# Altium PCB PCB_4k7_G_V3.02_2022-01-05.pcbdoc
Units mil, origin at the board's own origin, x right, y up, seen from the top; angles counter-clockwise.
Board outline 2390.5 x 3974 mil, 2 copper layers (Top Layer, Bottom Layer); 29 components, 29 nets, 109 pads, 3 vias.
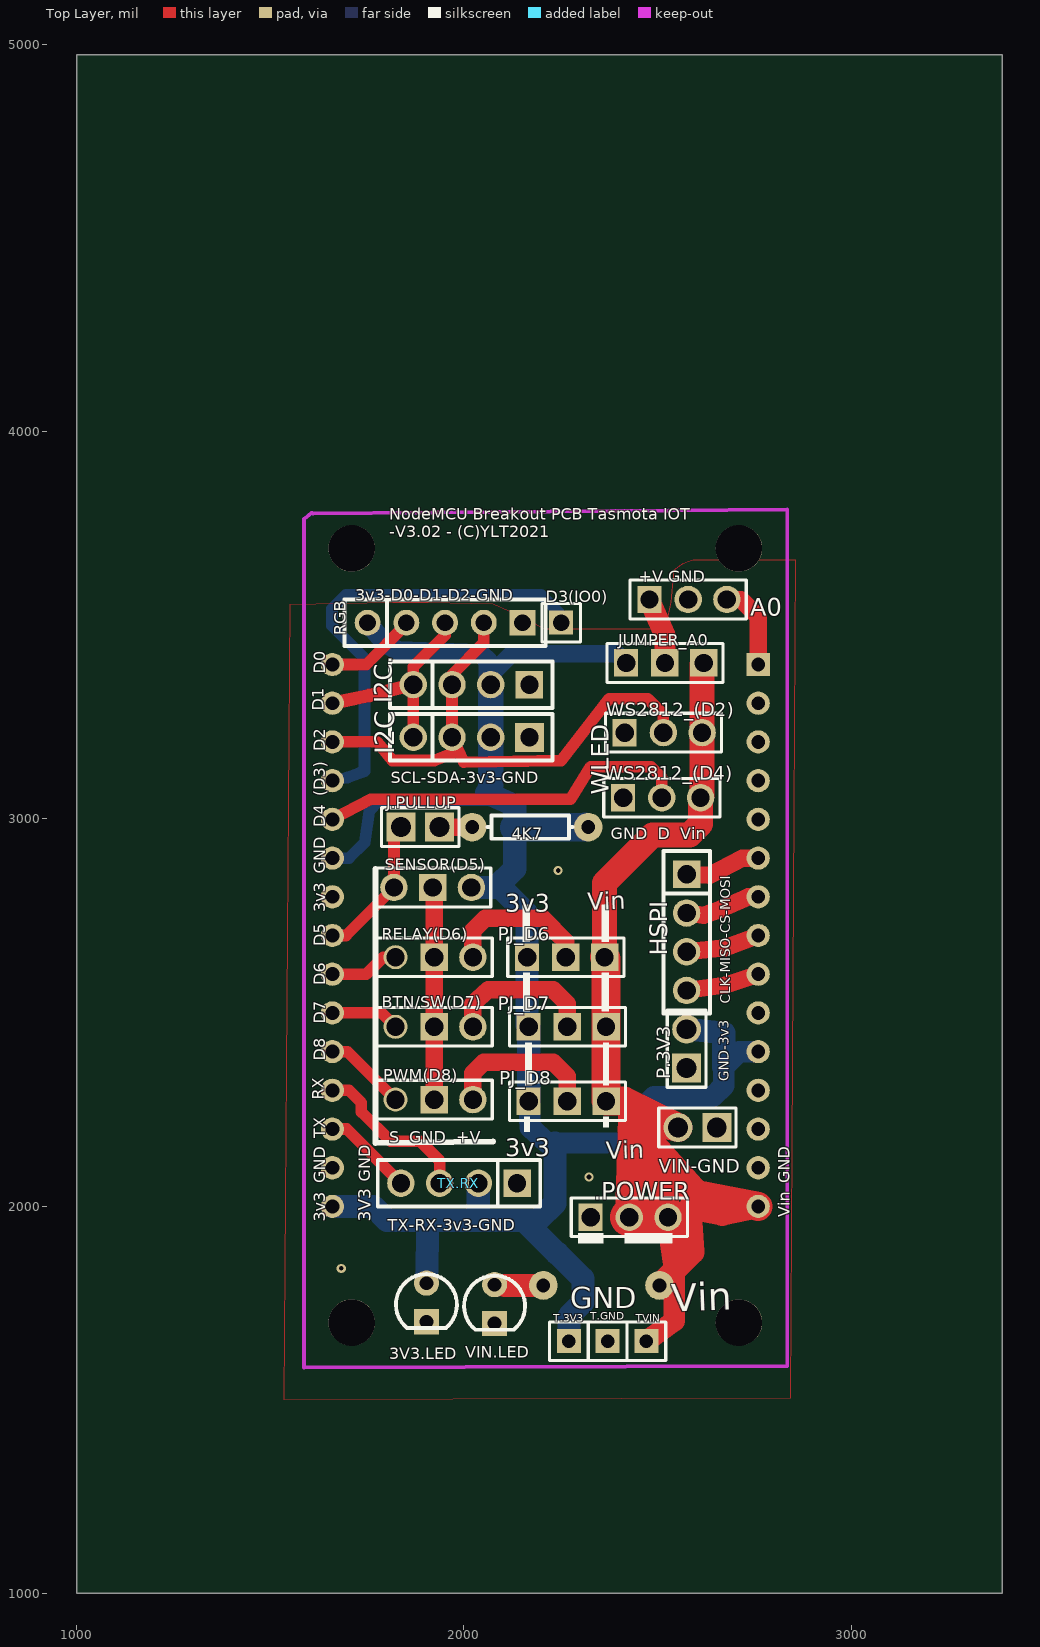
[diagram p0: Top Layer view]
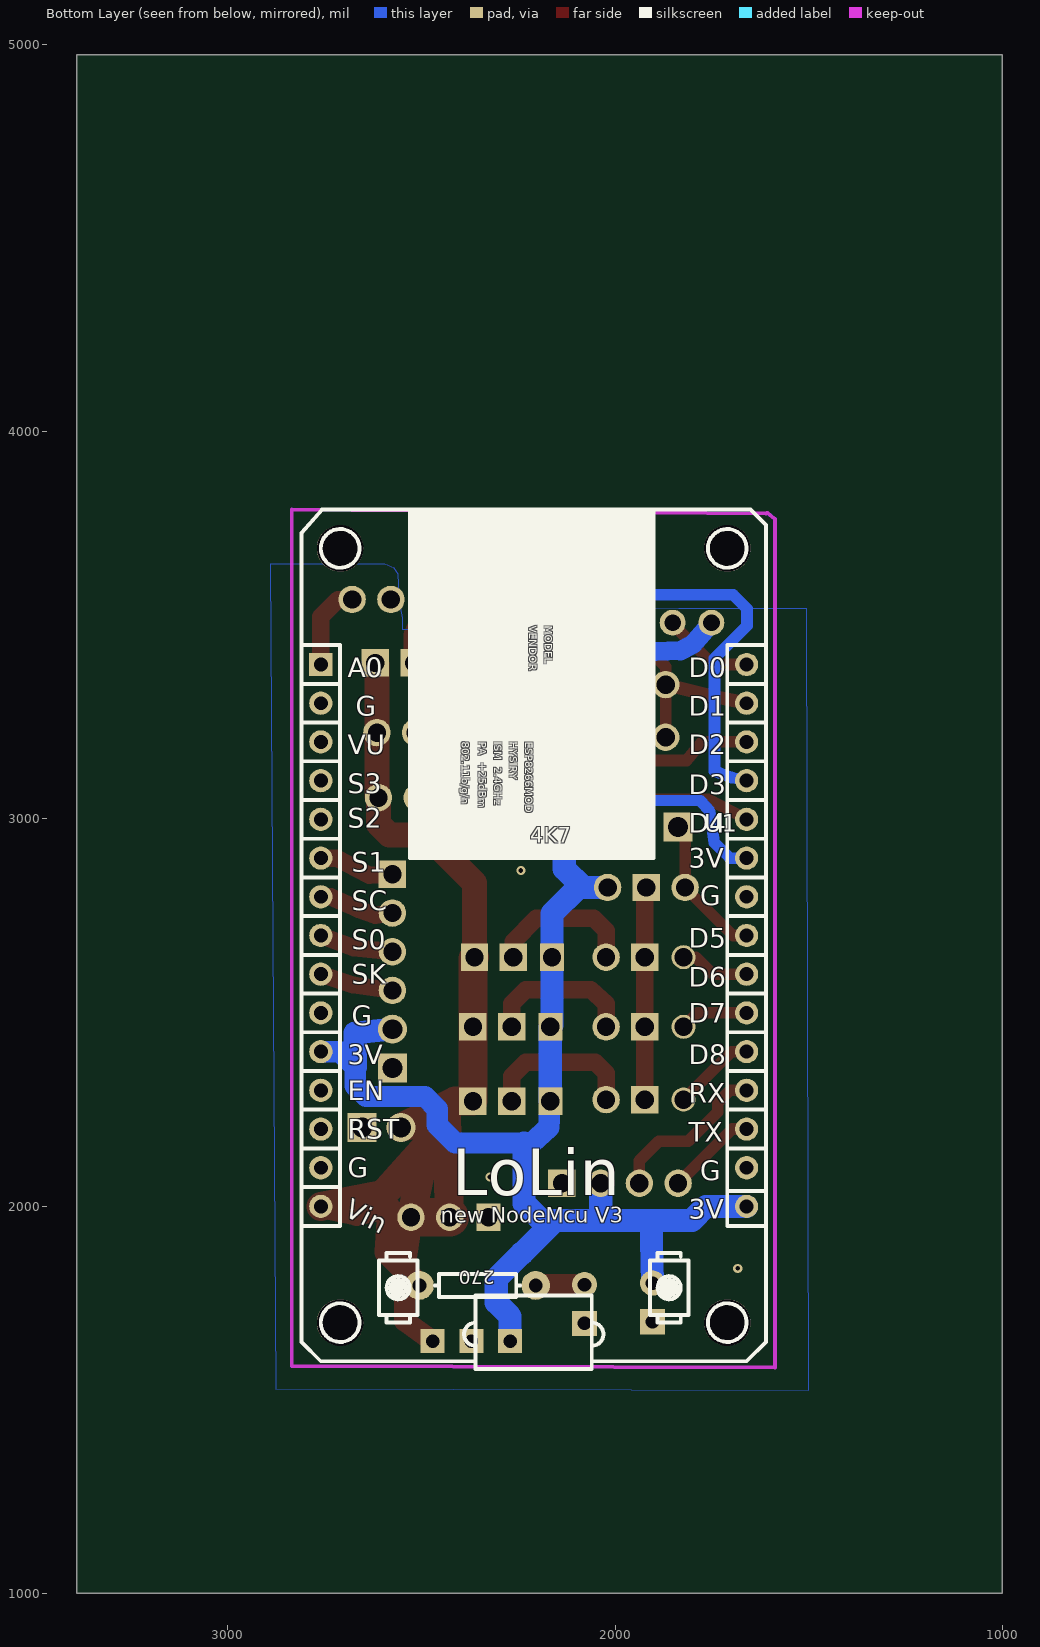
[diagram p1: Bottom Layer view, seen from below]

## Layer stack, top to bottom
Top Layer: signal copper (thickness not stored)
Dielectric: dielectric 12.6, FR-4, Dk 4.8
Bottom Layer: signal copper (thickness not stored)

## Board outline
3390.5,1000 1000,1000 1000,4974 3390.5,4974

## Components (designator, comment, footprint, x,y, rotation, side; value= is the part's Value field where it differs from the comment)
3V3.LED "LED-TH-3mm_G" LED-TH_BD3.0_GREEN 1903.25,1751 r0 top
4K7 "4k7" AXIAL-0.3#1 2171.25,2979 r180 top
270 "4k7" AXIAL-0.3#2 2355.25,1795 r180 bottom
.POWER "Header-Male-2.54_1x3" HDR-TH_3P-P2.54-V#1 2427.25,1971 r0 top
A0 "Header-Male-2.54_1x3" HDR-TH_3P-P2.54-V#1 2579.25,3567 r0 top
BTN/SW(D7) "Header-Male-2.54_1x3" HDR-TH_3P-P2.54-V#2 1923.25,2463 r0 top
D3(IO0) "HDR-M-2.54_1x1" HDR-M-2.54_1X1 2251.25,3507 r0 top
HSPI "Header-Male-2.54_1x4" DIP-1X4P-2.54MM-M#1 2575.25,2707 r270 top
I2C "Header-Male-2.54_1x4" DIP-1X4P-2.54MM-M#2 2019.25,3211 r0 top
I2C. "Header-Male-2.54_1x4" DIP-1X4P-2.54MM-M#3 2019.25,3347 r0 top
J.PULLUP "Header-Male-2.54_1x2" HDR-2X1/2.54#1 1887.25,2979 r90 top
JUMPER_A0 "Header-Male-2.54_1x3" HDR-TH_3P-P2.54-V#3 2519.25,3403 r0 top
P.3V3 "Header-Male-2.54_1x2" HDR-2X1/2.54#2 2575.25,2407 r180 top
PJ_D6 "Header-Male-2.54_1x3" HDR-TH_3P-P2.54-V#3 2263.25,2643 r0 top
PJ_D7 "Header-Male-2.54_1x3" HDR-TH_3P-P2.54-V#3 2267.25,2463 r0 top
PJ_D8 "Header-Male-2.54_1x3" HDR-TH_3P-P2.54-V#3 2267.25,2271 r0 top
PWM(D8) "Header-Male-2.54_1x3" HDR-TH_3P-P2.54-V#2 1923.25,2275 r0 top
RELAY(D6) "Header-Male-2.54_1x3" HDR-TH_3P-P2.54-V#2 1923.25,2643 r0 top
RGB "Header-Male-2.54_1x5" DIP-1X5P-2.54MM-M 1951.25,3507 r0 top
SENSOR(D5) "Header-Male-2.54_1x3" HDR-TH_3P-P2.54-V#4 1919.25,2823 r0 top
T.3V3 "Header-Male-2.54_1x1" HDR-1X1/2.54 2271.25,1651 r270 top
T.GND "Header-Male-2.54_1x1" HDR-1X1/2.54 2371.25,1651 r270 top
TVIN "TVin" HDR-1X1/2.54 2471.25,1651 r0 top
TX.RX "Header-Male-2.54_1x4" DIP-1X4P-2.54MM-M#1 1987.25,2059 r180 top
U1 "NodeMCU ESP8266-12E" NODEMCU 2210.25,2699 r0 bottom
VIN-GND "Header-Male-2.54_1x2" HDR-2X1/2.54#2 2603.25,2203 r270 top
VIN.LED "LED-TH-3mm_B" LED-TH_BD3.0_BLUE 2079.25,1747 r0 top
WS2812_(D2) "Header-Male-2.54_1x3" HDR-TH_3P-P2.54-V#1 2515.25,3223 r0 top
WS2812_(D4) "Header-Male-2.54_1x3" HDR-TH_3P-P2.54-V#1 2511.25,3055 r0 top

## Footprints (in the part's own frame and the unit in brackets; to place one, negate y for a bottom-side part, rotate by r counter-clockwise, add the part's x,y. Pads: shape width x height; smd on the part's side, far side on the other; paste and mask are expansions set on the pad)
AXIAL-0.3#1 [mil]
  round 74 hole 35.4: 1(-150,0) 2(150,0)
  silkscreen extent -110,-30 110,30
AXIAL-0.3#2 [mil]
  round 74 hole 35.4: 1(150,0) 2(-150,0)
  silkscreen extent -110,-30 110,30
DIP-1X4P-2.54MM-M#1 [mm]
  rect 1.8x1.8 hole 1.2: 1(-3.81,0)
  round 1.8 hole 1.2: 2(-1.27,0) 3(1.27,0) 4(3.81,0)
  silkscreen extent -5.33,-1.52 5.33,1.52
DIP-1X4P-2.54MM-M#2 [mm]
  round 1.8 hole 1.2: 1(-3.81,0) 2(-1.27,0) 3(1.27,0)
  rect 1.905x1.905 hole 1.2: 4(3.81,0)
  silkscreen extent -5.33,-1.52 5.33,1.52
DIP-1X4P-2.54MM-M#3 [mm]
  round 1.8 hole 1.2: 1(-3.81,0) 2(-1.27,0) 3(1.27,0)
  rect 1.8x1.8 hole 1.2: 4(3.81,0)
  silkscreen extent -5.33,-1.52 5.33,1.52
DIP-1X5P-2.54MM-M [mm]
  round 1.7 hole 1.1: 1(-5.08,0) 2(-2.54,0) 3(0,0) 4(2.54,0)
  rect 1.7x1.7 hole 1.1: 5(5.08,0)
  silkscreen extent -6.6,-1.52 6.6,1.52
HDR-1X1/2.54 [mil]
  rect 62x62 hole 35: 1(0,0)
  silkscreen extent -50,-50 50,50
HDR-2X1/2.54#1 [mm]
  rect 1.9x1.9 hole 1.3: 1(0,1.27) 2(0,-1.27)
  silkscreen extent -1.27,-2.54 1.27,2.54
HDR-2X1/2.54#2 [mm]
  rect 1.9x1.9 hole 1.3: 1(0,1.27)
  round 1.9 hole 1.3: 2(0,-1.27)
  silkscreen extent -1.27,-2.54 1.27,2.54
HDR-M-2.54_1X1 [mil]
  rect 62x62 hole 43.31: 1(0,0)
  silkscreen extent -50,-50 50,50
HDR-TH_3P-P2.54-V#1 [mm]
  rect 1.575x1.8 hole 1.2: 1(-2.54,0)
  round 1.8 hole 1.2: 2(0,0) 3(2.54,0)
  silkscreen extent -3.81,-1.27 3.81,1.27
HDR-TH_3P-P2.54-V#2 [mm]
  round 1.575 hole 1.2: 1(-2.54,0)
  rect 1.8x1.8 hole 1.2: 2(0,0)
  round 1.8 hole 1.2: 3(2.54,0)
  silkscreen extent -3.81,-1.27 3.81,1.27
HDR-TH_3P-P2.54-V#3 [mm]
  rect 1.575x1.8 hole 1.2: 1(-2.54,0)
  rect 1.8x1.8 hole 1.2: 2(0,0) 3(2.54,0)
  silkscreen extent -3.81,-1.27 3.81,1.27
HDR-TH_3P-P2.54-V#4 [mm]
  round 1.8 hole 1.2: 1(-2.54,0) 3(2.54,0)
  rect 1.8x1.8 hole 1.2: 2(0,0)
  silkscreen extent -3.81,-1.27 3.81,1.27
LED-TH_BD3.0_BLUE [mil]
  round 65 hole 35.43: 1(0,50)
  rect 65x65 hole 35.43: 2(0,-50)
  silkscreen extent -79,-66 79,73
LED-TH_BD3.0_GREEN [mil]
  round 65 hole 35.43: 1(0,50)
  rect 65x65 hole 35.43: 2(0,-50)
  silkscreen extent -79,-66 79,73
NODEMCU [mil]
  round 60 hole 36: 1(-550,700) 2(-550,600) 3(-550,500) 4(-550,400) 5(-550,300) 6(-550,200) 7(-550,100) 8(-550,0) 9(-550,-100) 10(-550,-200) 11(-550,-300) 12(-550,-400) 13(-550,-500) 14(-550,-600) 15(-550,-700) 17(550,-600) 18(550,-500) 19(550,-400) 20(550,-300) 21(550,-200) 22(550,-100) 23(550,0) 24(550,100) 25(550,200) 26(550,300) 27(550,400) 28(550,500) 29(550,600) 30(550,700)
  rect 60x60 hole 36: 16(550,-700)
  silkscreen extent -600,-1100 600,1120

## Free pads (board coordinates)
  round 120 hole 120 unplated: ""(1710.25,1699) ""(1710.25,3699) ""(2710.25,1699) ""(2710.25,3699)

## Via types
v1: diameter 24, hole 12, Top Layer to Bottom Layer, 3 vias

## Nets (pads, with @x,y where several pads share a name; then routed paths per layer and width w, separated by ;. In a path a pad name is that pad's centre, name@x,y a point inside that pad or via, vN(x,y) a via of type N, cw(c..) or ccw(c..) an arc to the next point about the centre after c; other vN are vias at no path point)
4K7_2: 4K7.2 J.PULLUP.2 | length 76
  Top Layer w45: J.PULLUP.2 4K7.2@2013.24,2979
+5V: 270.2 .POWER.2 .POWER.3 JUMPER_A0.3 PJ_D6.3 PJ_D7.3 PJ_D8.3 TVIN.1 U1.30 VIN-GND.2 WS2812_(D2).3 WS2812_(D4).3 | length 3244.2
  Top Layer w55: TVIN.1 2543.25,1703 2543.25,1843 .POWER.3@2527.25,1947
  Top Layer w60: 270.2 2591.25,1881 2583.25,1995 2667.25,1979 U1.30
  Top Layer w65: PJ_D6.3 2363.25,2835 2487.25,2959 2583.25,2959 2611.25,2987 2611.25,3055 2615.25,3059 2615.25,3223 2615.25,3399 JUMPER_A0.3
  Top Layer w75: PJ_D6.3 2367.25,2639 PJ_D7.3 PJ_D8.3 2413.25,2271 VIN-GND.2 2435.25,2227 .POWER.2 ; .POWER.3 2487.25,2155 2599.25,2031 U1.30
  Top Layer w100: .POWER.2 2479.25,1971 .POWER.3
A0_1: A0.1 JUMPER_A0.2 | length 172.3
  Top Layer w55: A0.1 2519.25,3475 JUMPER_A0.2
BTN/SW(D7)_3: BTN/SW(D7).3 PJ_D7.2 | length 392.7
  Top Layer w45: 2023.25,2463 2023.25,2523 2063.25,2559 2231.25,2559 2267.25,2523 PJ_D7.2
GND: 3V3.LED.2 .POWER.1 A0.2 BTN/SW(D7).2 I2C.4 I2C..4 P.3V3.1 PWM(D8).2 RELAY(D6).2 RGB.5 SENSOR(D5).2 T.GND.1 TX.RX.1 U1.2 U1.9 U1.17 U1.25 U1.29 VIN-GND.1 VIN.LED.2 WS2812_(D2).1 WS2812_(D4).1 | length 549.7
  Top Layer w45: 1919.25,2823 1923.25,2819 1923.25,2643 1923.25,2463 1923.25,2275
  other v1: 1683.25,1839 2323.25,2075 2243.25,2867
PWM(D8)_3: PJ_D8.2 PWM(D8).3 | length 402.5
  Top Layer w45: 2023.25,2275 2023.25,2343 2051.25,2371 2231.25,2371 2267.25,2335 PJ_D8.2
RELAY(D6)_3: PJ_D6.2 RELAY(D6).3 | length 386.1
  Top Layer w45: 2023.25,2643 2023.25,2711 2055.25,2743 2203.25,2743 2263.25,2683 PJ_D6.2
S$15: 
S$17: 
S$5214: 
S$5704: 
U1_3: TX.RX.4 U1.3 | length 235
  Top Layer w30: U1.3 1697.25,2199 TX.RX.4
U1_4: TX.RX.3 U1.4 | length 424.4
  Top Layer w30: U1.4 1703.25,2299 1735.25,2267 1735.25,2243 1811.25,2167 1887.25,2167 1937.25,2117 TX.RX.3
U1_5: PWM(D8).1 U1.5 | length 214.4
  Top Layer w30: U1.5 1699.25,2399 1823.25,2275
U1_6: BTN/SW(D7).1 U1.6 | length 177.9
  Top Layer w30: U1.6 1787.25,2499 1823.25,2463
U1_7: RELAY(D6).1 U1.7 | length 181.2
  Top Layer w30: U1.7 1747.25,2599 1791.25,2643 1823.25,2643
U1_8: J.PULLUP.1 SENSOR(D5).1 U1.8 | length 373.8
  Top Layer w30: U1.8 1695.25,2699 1819.25,2823 1819.25,2961 J.PULLUP.1
U1_11: U1.11 WS2812_(D4).2 | length 974.2
  Top Layer w30: U1.11 1759.25,3051 2275.25,3051 2327.25,3135 2483.25,3135 2511.25,3107 2511.25,3055
U1_12: D3(IO0).1 U1.12 | length 1189.9
  Bottom Layer w30: U1.12 1699.25,3107 1731.25,3119 1743.25,3123 1743.25,3415 1659.25,3499 1659.25,3543 1695.25,3579 2199.25,3579 2251.25,3527 2251.25,3507
U1_13: I2C.2 I2C..2 RGB.4 U1.13 WS2812_(D2).2 | length 1436.6
  Top Layer w30: U1.13 1775.25,3199 1815.25,3151 1923.25,3151 1969.25,3169 I2C.2 ; RGB.4 2051.25,3455 1969.25,3373 I2C..2 I2C.2 ; 2515.25,3223 2515.25,3271 2475.25,3311 2375.25,3311 2251.25,3151 1999.25,3147 I2C.2
U1_14: I2C.1 I2C..1 RGB.3 U1.14 | length 544.4
  Top Layer w30: I2C.1 I2C..1 1869.25,3393 1951.25,3475 RGB.3
  Top Layer w35: U1.14 1755.25,3319 I2C..1
U1_15: RGB.2 U1.15 | length 238.1
  Top Layer w30: U1.15 1747.25,3399 1851.25,3503 RGB.2
U1_16: A0.3 U1.16 | length 222.6
  Top Layer w45: A0.3 2715.25,3567 2760.25,3522 U1.16
U1_21: HSPI.1 U1.21 | length 195.9
  Top Layer w45: HSPI.1 2635.25,2855 2719.25,2899 U1.21
U1_22: HSPI.2 U1.22 | length 195
  Top Layer w45: HSPI.2 2619.25,2751 2663.25,2767 2734.55,2798.8 U1.22
U1_23: HSPI.3 U1.23 | length 191.3
  Top Layer w45: HSPI.3 2675.25,2667 U1.23
U1_24: HSPI.4 U1.24 | length 190.5
  Top Layer w45: HSPI.4 2675.25,2571 U1.24
VCC: 3V3.LED.1 4K7.1 I2C.3 I2C..3 JUMPER_A0.1 P.3V3.2 PJ_D6.1 PJ_D7.1 PJ_D8.1 RGB.1 SENSOR(D5).3 T.3V3.1 TX.RX.2 U1.1 U1.10 U1.26 | length 5235.9
  Bottom Layer w30: U1.10 1703.25,2899 1743.25,2939 1755.25,3019 1779.25,3047 2101.25,3048
  Bottom Layer w45: I2C..3 2069.25,3373 2123.25,3427 2395.25,3427 JUMPER_A0.1
  Bottom Layer w50: RGB.1 1799.25,3451 1831.25,3435 2043.25,3427 2063.25,3407 2063.25,3353 I2C..3
  Bottom Layer w55: PJ_D8.1 2171.25,2203 2215.25,2163 2413.05,2163 2459.25,2209.2 2459.25,2251 2491.25,2283 2643.25,2283 2671.25,2311 2671.25,2359 2711.25,2399 U1.26
  Bottom Layer w60: U1.1 1765.25,1999 1801.25,1963 2191.25,1963 2235.25,2007 2235.25,2163 ; 3V3.LED.1 1907.25,1963 1928.38,1963 ; 2019.25,2823 2095.25,2823 2163.25,2755 PJ_D6.1 2163.25,2467 2167.25,2463 PJ_D8.1@2167.25,2271 ; 2037.05,1963 TX.RX.2 ; 2071.25,3087 2059.25,3067 2131.25,3035 2131.25,2871.6 2082.65,2823 ; 2154.95,1963 2239.85,1878.1 2241.45,1878.1 2307.25,1812.3 2307.25,1751 2271.25,1715 T.3V3.1 ; P.3V3.2 2671.25,2447 2671.25,2359
  Bottom Layer w65: 2069.25,3087 I2C.3 I2C..3
  Bottom Layer w75: 2131.25,2978 4K7.1@2313.25,2979
VIN.LED_1: 270.1 VIN.LED.1 | length 102.8
  Top Layer w60: VIN.LED.1 VIN.LED.1@2081.25,1795 ; VIN.LED.1@2105.25,1795 270.1
pads on no net: U1.18 U1.19 U1.20 U1.27 U1.28

## Polygon pours and split planes (outlines as drawn)
GND on Bottom Layer (solid): 1505.5,3542.75 1835.5,3542.75 2120,3540.25 2164,3524.25 2232,3488.25 2548,3488.25 2548,3520.25 2556,3560.25 2560.5,3632.75 2570.5,3647.75 2595.5,3657.75 2890.5,3657.75 2876,1528.25 1500,1524.25
GND on Top Layer (solid): 1551.25,3555 1815.5,3560 1907.5,3560 2075.5,3556 2155.5,3520 2207.5,3492 2523.5,3492 2527.5,3524 2535.5,3560 2543.5,3644 2566.25,3660 2591.25,3670 2856.25,3670 2843.5,1504 1535.5,1500

## Silkscreen, mask and mechanical layers (free items; w line width, h text height)
Top Overlay:
  rectangle: 2295.25,1903 2361.07,1931
  rectangle: 2415.25,1903 2539.25,1931
  rectangle: 2359.25,2203 2375.25,2231
  rectangle: 2359.25,2311 2375.25,2423
  rectangle: 2355.25,2503 2374.26,2603
  rectangle: 2355.25,2682 2374.55,2779
  rectangle: 2155.61,2191 2171.25,2231
  rectangle: 2158.28,2311 2175.25,2423
  rectangle: 2152.94,2503 2171.25,2603
  rectangle: 2151.25,2682 2170.55,2779
  lines w15 net S$5214: 1771.25,2871 1771.25,2163 2075.25,2167
  text "NodeMCU Breakout PCB Tasmota IOT / -V3.02 - (C)YLT2021" at 1807.25,3728 h30
  text "+V GND" at 2451.25,3612 h30
  text "3v3-D0-D1-D2-GND" at 1719.25,3564 h30
  text "D0" at 1642.25,3375 h30 r90
  text "D1" at 1638.25,3279 h30 r90
  text "D2" at 1642.25,3175 h30 r90
  text "SCL-SDA-3v3-GND" at 1811.25,3092 h30
  text "WLED" at 2373.75,3063 h45 r90
  text "(D3)" at 1642.25,3059 h30 r90
  text "D4" at 1642.25,2979 h30 r90
  text "GND  D  Vin" at 2379.25,2948 h30
  text "GND" at 1642.25,2859 h30 r90
  text "Vin" at 2320.04,2764.51 h45 r2
  text "3v3" at 2107.25,2760.5 h45
  text "3v3" at 1642.25,2759 h30 r90
  text "D5" at 1642.25,2671 h30 r90
  text "D6" at 1642.25,2571 h30 r90
  text "CLK-MISO-CS-MOSI" at 2687.75,2523 h25 r90
  text "D7" at 1642.25,2471 h30 r90
  text "D8" at 1642.25,2375 h30 r90
  text "GND-3v3" at 2683.75,2323 h25 r90
  text "RX" at 1638.25,2275 h30 r90
  text "TX" at 1642.25,2175 h30 r90
  text "S  GND  +V" at 1807.25,2164 h30
  text "3v3" at 2107.25,2128.5 h45
  text "Vin" at 2368.04,2120.51 h45 r2
  text "GND" at 1758.25,2063 h30 r90
  text "GND" at 1642.25,2059 h30 r90
  text "GND" at 2842.25,2059 h30 r90
  text "Vin" at 2842.25,1971 h30 r90
  text "3v3" at 1642.25,1959 h30 r90
  text "3V3" at 1759.25,1959 h32 r90
  text "TX-RX-3v3-GND" at 1803.25,1936 h30
  text "GND" at 2275.25,1735.5 h55
  text "Vin" at 2536.51,1727.02 h72 r2
Bottom Overlay:
  lines w25 net S$5704: 2055.25,2935 2311.25,2935 2311.25,3023 2055.25,3023 2055.25,2935
  text "4K7" at 2219.25,2939 h40
Document:
  lines w0.1: 2194.25,2986 2196.25,2988

## Text inside footprints (layer, text, board x,y; h text height)
U1: Bottom Overlay "MODEL" at 2182.05,3499 h20 r90; Bottom Overlay "VENDOR" at 2222.05,3499 h20 r90; Bottom Overlay "ESP8266MOD" at 2232.05,3199 h20 r90; Bottom Overlay "HYSIRY" at 2272.05,3199 h20 r90; Bottom Overlay "ISM  2.4GHz" at 2312.05,3199 h20 r90; Bottom Overlay "PA  +25dBm" at 2352.05,3199 h20 r90; Bottom Overlay "802.11b/g/n" at 2395.75,3199 h20 r90; Bottom Overlay "LoLin" at 2420.25,2028.1 h120; Bottom Overlay "new NodeMcu V3" at 2450.25,1957.2 h40; Bottom Overlay "A0" at 2690.25,3366.7 h50; Bottom Overlay "G" at 2670.25,3266.7 h50; Bottom Overlay "VU" at 2690.25,3166.7 h50; Bottom Overlay "S3" at 2690.25,3066.7 h50; Bottom Overlay "S2" at 2690.25,2976.7 h50; Bottom Overlay "S1" at 2680.25,2864 h50; Bottom Overlay "SC" at 2680.25,2764 h50; Bottom Overlay "S0" at 2680.25,2664 h50; Bottom Overlay "SK" at 2680.25,2574 h50; Bottom Overlay "G" at 2680.25,2466.7 h50; Bottom Overlay "3V" at 2690.25,2366.7 h50; Bottom Overlay "EN" at 2690.25,2274 h50; Bottom Overlay "RST" at 2690.25,2174 h50; Bottom Overlay "G" at 2690.25,2074 h50; Bottom Overlay "Vin" at 2701.6,1976.72 h50 r27; Bottom Overlay "3V" at 1810.25,1966.7 h50; Bottom Overlay "G" at 1780.25,2066.7 h50; Bottom Overlay "TX" at 1810.25,2166.7 h50; Bottom Overlay "RX" at 1810.25,2266.7 h50; Bottom Overlay "D8" at 1810.25,2366.7 h50; Bottom Overlay "D7" at 1810.25,2474 h50; Bottom Overlay "D6" at 1810.25,2566.7 h50; Bottom Overlay "D5" at 1810.25,2666.7 h50; Bottom Overlay "G" at 1780.25,2776.7 h50; Bottom Overlay "3V" at 1810.25,2874 h50; Bottom Overlay "D4" at 1810.25,2964 h50; Bottom Overlay "D3" at 1810.25,3064 h50; Bottom Overlay "D2" at 1810.25,3166.7 h50; Bottom Overlay "D1" at 1810.25,3266.7 h50; Bottom Overlay "D0" at 1810.25,3366.7 h50